# Altium PCB PCB.PcbDoc (part 2 of 3)
Units mm, origin at the board's own origin, x right, y up, seen from the top; angles counter-clockwise.
Board outline 68.58 x 53.34 mm, 4 copper layers (TOP, INNER1, INNER2, BOTTOM), stack 1.586 mm thick; 94 components, 161 nets, 536 pads, 304 vias.
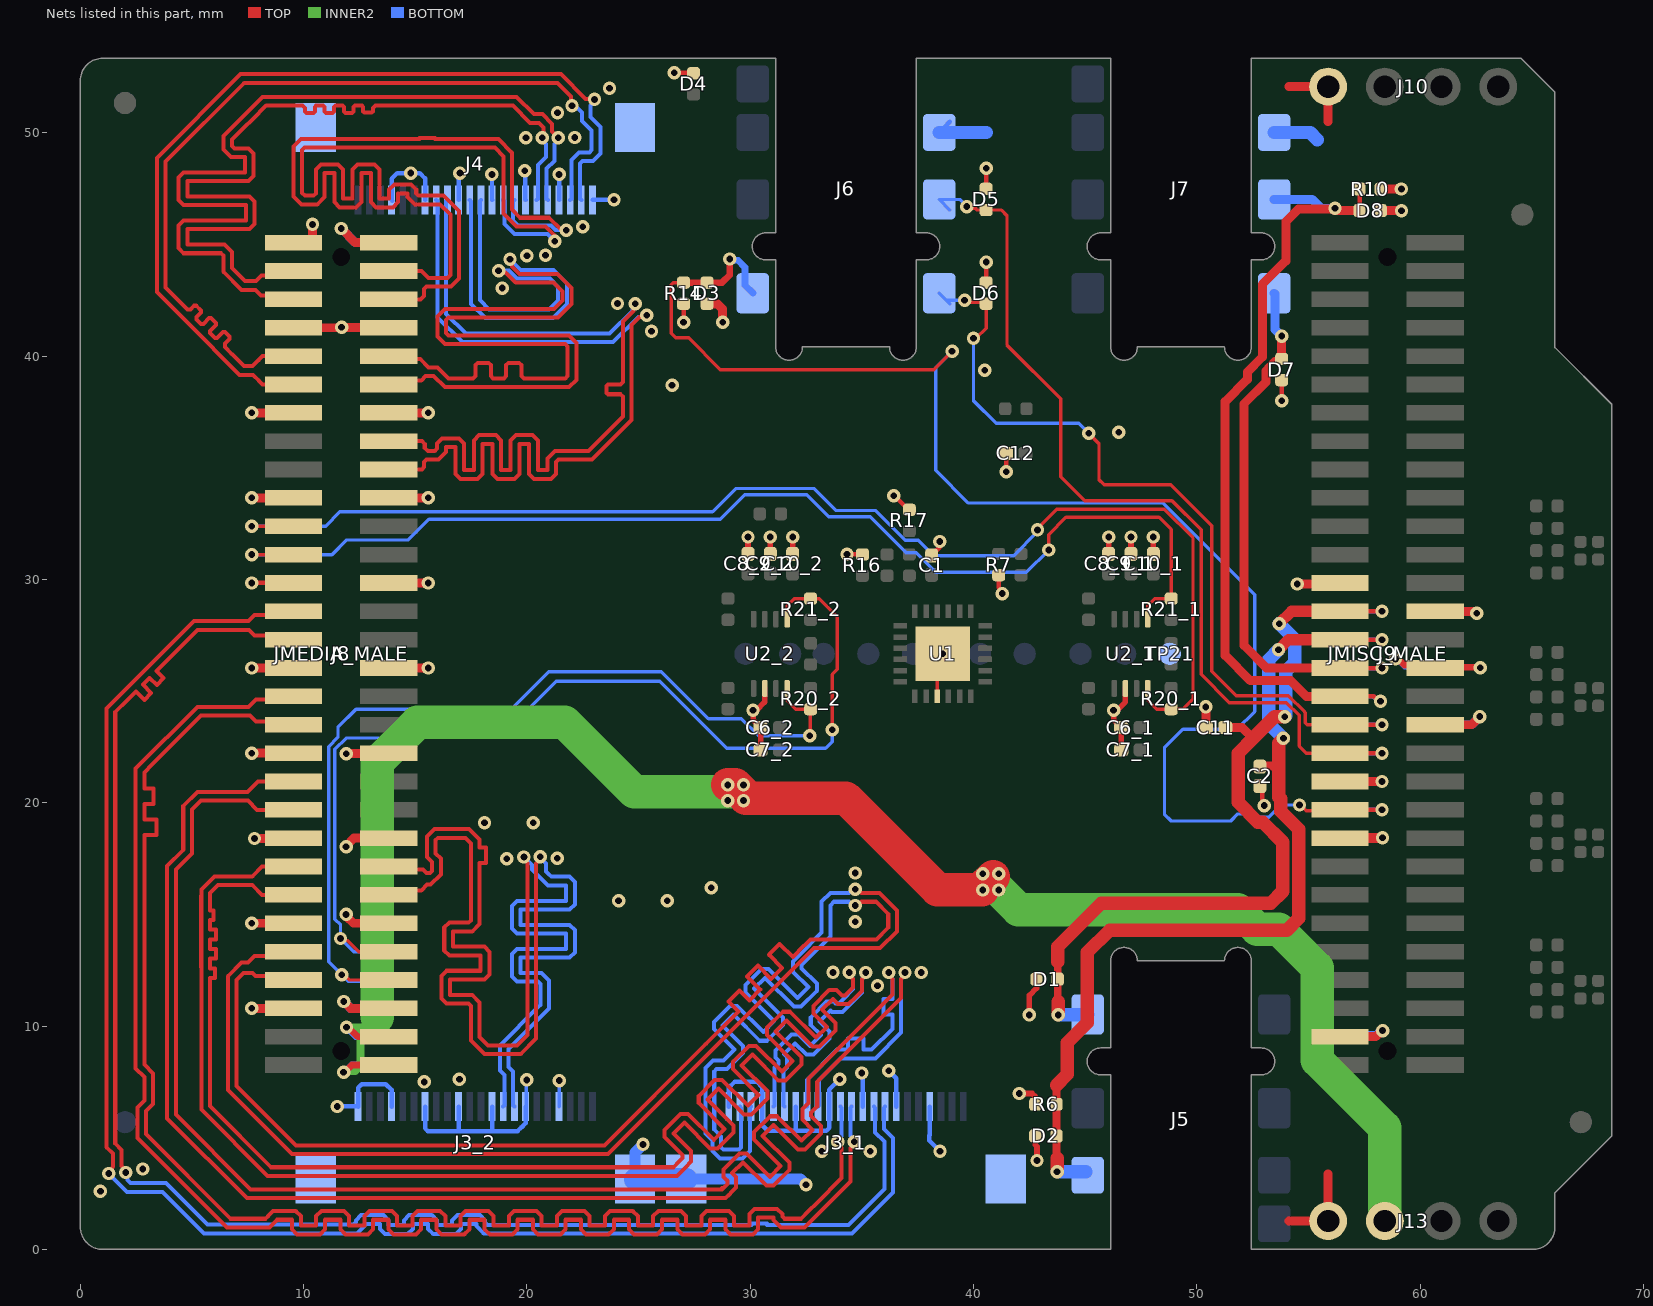
[diagram p4: the nets of this part, all layers, seen from the top]

## Via types
v1: diameter 0.6, hole 0.3, TOP to BOTTOM, tented both sides, 304 vias

## Nets (pads, with @x,y where several pads share a name; then routed paths per layer and width w, separated by ;. In a path a pad name is that pad's centre, name@x,y a point inside that pad or via, vN(x,y) a via of type N, cw(c..) or ccw(c..) an arc to the next point about the centre after c; other vN are vias at no path point) (continued)
CSI0_D3_N: J3_2.14 JMEDIA_MALE.45 | length 52.9
  TOP w0.18: JMEDIA_MALE.45@13.819,17.145 13.962,17.002 15.347,17.002 15.503,16.846 15.652,16.846 15.757,16.952 15.757,17.343 15.524,17.576 15.524,18.489 15.858,18.822 17.412,18.822 17.886,18.348 17.886,18.088 17.886,17.998 18.173,17.998 18.173,17.31 17.886,17.31 17.886,16.284 17.886,15.5 17.886,14.578 17.552,14.244 16.688,14.244 16.688,13.556 18.094,13.556 18.322,13.327 18.322,12.316 18.094,12.088 16.561,12.088 16.561,11.4 17.552,11.4 17.886,11.066 17.886,10.7 17.886,9.514 18.263,9.137 19.563,9.137 20.021,9.595 20.021,17.305 19.867,17.459 v1(19.867,17.573)
  BOTTOM w0.18: J3_2.14@18.94,6.395 18.995,6.45 18.995,7.805 18.786,8.014 18.786,9.137 20.506,10.858 20.6,10.952 20.6,11.883 20.495,11.988 19.558,11.988 19.33,12.217 19.33,13.228 19.558,13.456 21.753,13.456 21.753,14.144 19.558,14.144 19.33,14.373 19.33,15.384 19.558,15.612 21.753,15.612 21.753,16.3 20.934,16.3 20.6,16.634 20.443,16.791 20.423,16.811 20.342,16.892 20.22,17.014 20.22,17.219 v1(19.867,17.573)
CSI0_D3_P: J3_2.15 JMEDIA_MALE.47 | length 53
  TOP w0.18: JMEDIA_MALE.47@13.819,15.875 14.023,16.079 15.269,16.079 15.522,16.333 15.69,16.333 16.147,16.79 16.147,17.504 15.914,17.738 15.914,18.327 16.019,18.432 17.25,18.432 17.496,18.186 17.496,15.5 17.496,14.739 17.391,14.634 16.526,14.634 16.298,14.405 16.298,13.394 16.526,13.166 17.932,13.166 17.932,12.478 16.4,12.478 16.171,12.249 16.171,11.238 16.4,11.01 17.391,11.01 17.496,10.904 17.496,10.7 17.496,9.352 18.101,8.747 19.724,8.747 20.411,9.434 20.411,17.291 20.594,17.474 v1(20.594,17.588)
  BOTTOM w0.18: J3_2.15@19.44,6.395 19.385,6.45 19.385,7.967 19.176,8.176 19.176,8.976 20.99,10.79 20.99,10.858 20.99,12.044 20.656,12.378 19.72,12.378 19.72,13.066 21.915,13.066 22.143,13.295 22.143,14.306 21.915,14.534 19.72,14.534 19.72,15.222 21.915,15.222 22.143,15.451 22.143,16.462 21.915,16.69 21.095,16.69 20.99,16.796 20.861,16.925 20.861,17.009 20.861,17.289 20.594,17.556 v1(20.594,17.588)
CSI1_CK_N: J3_1.8 JMEDIA_MALE.42 | length 74.3
  TOP w0.18: JMEDIA_MALE.42@9.549,19.685 7.915,19.685 7.5,20.1 5.4,20.1 5,19.7 5,17.735 4.276,17.011 4.276,6.03 7.618,2.687 28.736,2.687 28.799,2.751 ; 28.728,2.751 28.799,2.751 ; v1(36.2,12.4) 36.2,12.286 36.369,12.117 36.369,11.414 32.612,7.657 32.612,6.564 32.591,6.542 32.332,6.284 32.332,5.812 32.789,5.355 32.302,4.868 31.209,5.962 30.886,5.962 30.171,5.247 30.171,4.924 31.367,3.728 30.881,3.241 29.835,4.287 29.512,4.287 28.797,3.572 28.797,3.249 28.972,3.073 28.972,2.924 28.799,2.751
  BOTTOM w0.18: J3_1.8@32.54,6.395 32.54,7.593 33.89,8.943 34.29,8.943 34.38,8.943 34.38,9.449 35.068,9.449 35.068,8.943 35.443,8.943 36.369,9.869 36.369,10.427 36.369,10.517 35.976,10.517 35.976,11.205 36.369,11.205 36.369,11.765 36.369,12.117 36.2,12.286 v1(36.2,12.4)
CSI1_CK_P: J3_1.9 JMEDIA_MALE.40 | length 74.6
  TOP w0.18: JMEDIA_MALE.40@9.884,20.955 JMEDIA_MALE.40@9.549,20.955 7.955,20.955 7.49,20.49 5.238,20.49 4.61,19.862 4.61,17.897 3.886,17.172 3.886,5.868 7.457,2.297 28.897,2.297 29.039,2.439 29.189,2.589 29.362,2.762 29.362,3.235 29.187,3.41 29.674,3.897 30.719,2.851 31.042,2.851 31.757,3.566 31.757,3.889 30.561,5.085 31.048,5.572 32.141,4.478 32.464,4.478 33.179,5.193 33.179,5.516 32.722,5.973 32.722,6.122 32.867,6.267 33.002,6.402 33.002,7.495 36.759,11.252 36.759,12.114 36.93,12.285 v1(36.93,12.399)
  BOTTOM w0.18: J3_1.9@33.04,6.395 33.083,6.438 33.083,7.585 34.051,8.553 35.604,8.553 36.759,9.708 36.759,12.114 36.93,12.285 v1(36.93,12.399)
CSI1_D0_N: J3_1.2 JMEDIA_MALE.54 | length 74.4
  TOP w0.18: JMEDIA_MALE.54@9.884,12.065 9.701,12.248 7.837,12.248 7.71,12.375 7.305,12.375 7,12.07 7,7.31 9.649,4.661 23.479,4.661 28.009,9.191 29.477,10.658 29.036,11.099 29.523,11.585 29.963,11.145 30.45,11.631 29.859,12.222 30.345,12.708 30.936,12.118 31.423,12.604 30.832,13.195 31.318,13.681 31.909,13.091 32.395,13.577 32.459,13.641 32.702,13.884 35.662,13.884 36.182,14.404 36.182,15.021 35.635,15.569 34.982,15.569 34.814,15.4 v1(34.7,15.4)
  BOTTOM w0.18: J3_1.2@29.54,6.395 29.595,6.34 29.595,4.573 29.49,4.467 28.805,4.467 28.7,4.573 28.7,5.048 28.39,5.358 28.39,6.855 28.39,7.5 28.39,7.971 28.495,8.077 28.968,8.077 29.683,8.792 29.683,9.115 28.767,10.031 29.253,10.517 30.427,9.343 30.75,9.343 31.465,10.058 31.465,10.381 30.172,11.675 30.658,12.161 31.952,10.868 32.275,10.868 32.99,11.583 32.99,11.906 32.307,12.589 32.307,12.738 32.451,12.882 33.59,14.021 33.59,15.41 33.748,15.569 34.418,15.569 34.586,15.4 v1(34.7,15.4)
CSI1_D0_P: J3_1.3 JMEDIA_MALE.52 | length 74.4
  TOP w0.18: JMEDIA_MALE.52@9.884,13.335 9.683,13.134 7.804,13.134 7.518,12.848 7.227,12.848 6.61,12.232 6.61,7.148 9.487,4.271 23.641,4.271 32.864,13.494 35.823,13.494 36.572,14.243 36.572,15.183 35.796,15.959 34.982,15.959 34.814,16.127 v1(34.7,16.127)
  BOTTOM w0.18: J3_1.3@30.04,6.395 29.985,6.34 29.985,4.411 29.651,4.077 28.644,4.077 28.31,4.411 28.31,4.887 28,5.197 28,7.212 28,7.5 28,8.133 28.334,8.467 28.806,8.467 29.293,8.953 28.377,9.869 28.377,10.192 29.092,10.907 29.415,10.907 30.589,9.733 31.075,10.22 29.782,11.513 29.782,11.836 30.497,12.551 30.82,12.551 32.113,11.258 32.6,11.744 31.917,12.427 31.917,12.9 32.175,13.158 33.2,14.183 33.2,15.572 33.587,15.959 34.418,15.959 34.586,16.127 v1(34.7,16.127)
CSI1_D1_N: J3_1.5 JMEDIA_MALE.48 | length 74
  TOP w0.18: JMEDIA_MALE.48@9.549,15.875 8.14,15.875 7.7,16.315 6.167,16.315 5.809,15.958 5.809,15.668 5.809,15.578 5.809,15.291 5.809,15.187 5.972,15.187 5.972,14.753 5.806,14.753 5.806,14.319 6.08,14.319 6.08,13.885 5.806,13.885 5.806,13.451 6.08,13.451 6.08,13.017 5.809,13.017 5.809,12.583 6.03,12.583 6.03,12.149 5.809,12.149 5.809,11.625 5.809,6.417 8.548,3.678 26.557,3.678 26.821,3.943 26.966,4.087 26.966,4.236 26.171,5.03 26.171,5.353 26.886,6.068 27.21,6.068 28.368,4.91 28.855,5.396 27.696,6.555 27.696,6.878 28.411,7.593 28.734,7.593 29.893,6.434 30.379,6.921 29.221,8.079 29.221,8.403 29.935,9.117 30.259,9.117 31.417,7.959 31.904,8.445 30.745,9.604 30.745,9.927 31.46,10.642 31.783,10.642 32.942,9.483 33.428,9.97 32.825,10.573 32.825,10.897 33.54,11.611 33.863,11.611 34.102,11.372 34.251,11.372 34.455,11.576 34.609,11.73 34.609,11.939 34.609,12.119 34.439,12.288 v1(34.439,12.402)
  BOTTOM w0.18: J3_1.5@31.04,6.395 31.095,6.45 31.095,8.147 31.113,8.165 31.258,8.309 31.258,8.458 31.133,8.583 31.133,8.906 31.848,9.621 32.171,9.621 32.684,9.109 33.17,9.595 32.711,10.054 32.711,10.377 33.426,11.092 33.749,11.092 33.82,11.021 33.969,11.021 34.172,11.223 34.609,11.66 34.609,12.119 34.439,12.288 v1(34.439,12.402)
CSI1_D1_P: J3_1.6 JMEDIA_MALE.46 | length 74.4
  TOP w0.18: JMEDIA_MALE.46@9.884,17.145 JMEDIA_MALE.46@9.549,17.145 8.14,17.145 7.7,16.705 6.005,16.705 5.419,16.119 5.419,15.829 5.416,15.825 5.416,12.642 5.419,12.638 5.419,6.255 8.386,3.288 26.718,3.288 27.097,3.667 27.356,3.926 27.356,4.398 26.561,5.192 27.048,5.678 28.207,4.52 28.53,4.52 29.245,5.234 29.245,5.558 28.086,6.716 28.572,7.203 29.731,6.044 30.054,6.044 30.769,6.759 30.769,7.082 29.611,8.241 30.097,8.727 31.256,7.569 31.579,7.569 32.294,8.284 32.294,8.607 31.135,9.766 31.622,10.252 32.78,9.093 33.104,9.093 33.818,9.808 33.818,10.131 33.215,10.735 33.701,11.221 33.94,10.982 34.412,10.982 34.73,11.3 34.989,11.559 34.999,11.569 34.999,12.116 35.17,12.287 v1(35.17,12.401)
  BOTTOM w0.18: J3_1.6@31.54,6.395 31.485,6.45 31.485,7.793 31.485,7.985 31.648,8.148 31.648,8.62 31.523,8.744 32.01,9.231 32.522,8.719 32.845,8.719 33.56,9.433 33.56,9.757 33.101,10.215 33.588,10.702 33.659,10.631 34.131,10.631 34.447,10.947 34.999,11.499 34.999,12.116 35.17,12.287 v1(35.17,12.401)
CSI1_D2_N: J3_1.11 JMEDIA_MALE.36 | length 74
  TOP w0.18: JMEDIA_MALE.36@9.549,23.495 9.409,23.635 7.865,23.635 7.595,23.905 6.505,23.905 5.405,23.905 3.217,21.717 2.865,21.365 2.865,20.629 3.268,20.629 3.268,19.941 2.865,19.941 2.865,19.253 3.409,19.253 3.409,18.565 2.865,18.565 2.865,17.787 2.865,8.272 3.255,7.882 3.255,6.51 2.941,6.196 2.941,5.16 6.729,1.372 8.098,1.372 8.303,1.372 8.408,1.477 8.408,1.489 8.637,1.717 9.648,1.717 9.876,1.489 9.876,1.063 10.564,1.063 10.564,1.489 10.793,1.717 11.804,1.717 12.032,1.489 12.032,1.063 12.72,1.063 12.72,1.489 12.949,1.717 13.96,1.717 14.188,1.489 14.188,1.063 14.876,1.063 14.876,1.489 15.105,1.717 16.116,1.717 16.344,1.489 16.344,1.063 17.032,1.063 17.032,1.489 17.261,1.717 18.272,1.717 18.5,1.489 18.5,1.063 19.188,1.063 19.188,1.489 19.417,1.717 20.428,1.717 20.656,1.489 20.656,1.063 21.344,1.063 21.344,1.489 21.573,1.717 22.584,1.717 22.812,1.489 22.812,1.063 23.5,1.063 23.5,1.489 23.729,1.717 24.74,1.717 24.968,1.489 24.968,1.063 25.656,1.063 25.656,1.489 25.885,1.717 26.896,1.717 27.124,1.489 27.124,1.063 27.812,1.063 27.812,1.489 28.041,1.717 29.052,1.717 29.28,1.489 29.28,1.063 29.968,1.063 29.968,1.585 30.197,1.813 31.208,1.813 31.436,1.585 31.436,1.477 31.542,1.372 32.272,1.372 32.616,1.716 32.982,2.082 34.095,3.195 34.095,4.541 33.926,4.71 v1(33.926,4.823)
  BOTTOM w0.18: v1(33.926,4.823) 33.926,4.911 34.095,5.08 34.095,6.34 J3_1.11@34.04,6.395
CSI1_D2_P: J3_1.12 JMEDIA_MALE.34 | length 74.1
  TOP w0.18: JMEDIA_MALE.34@9.549,24.765 9.419,24.635 7.868,24.635 7.528,24.295 6.667,24.295 5.244,24.295 2.475,21.527 2.475,8.11 2.865,7.72 2.865,6.672 2.551,6.357 2.551,4.998 6.567,0.982 8.098,0.982 8.464,0.982 8.798,1.316 8.798,1.327 9.486,1.327 9.486,0.902 9.715,0.673 10.726,0.673 10.954,0.902 10.954,1.327 11.642,1.327 11.642,0.902 11.871,0.673 12.882,0.673 13.11,0.902 13.11,1.327 13.798,1.327 13.798,0.902 14.027,0.673 15.038,0.673 15.266,0.902 15.266,1.327 15.954,1.327 15.954,0.902 16.183,0.673 17.194,0.673 17.422,0.902 17.422,1.327 18.11,1.327 18.11,0.902 18.339,0.673 19.35,0.673 19.578,0.902 19.578,1.327 20.266,1.327 20.266,0.902 20.495,0.673 21.506,0.673 21.734,0.902 21.734,1.327 22.422,1.327 22.422,0.902 22.651,0.673 23.662,0.673 23.89,0.902 23.89,1.327 24.578,1.327 24.578,0.902 24.807,0.673 25.818,0.673 26.046,0.902 26.046,1.327 26.734,1.327 26.734,0.902 26.963,0.673 27.974,0.673 28.202,0.902 28.202,1.327 28.89,1.327 28.89,0.902 29.119,0.673 30.13,0.673 30.358,0.902 30.358,1.423 31.046,1.423 31.046,1.316 31.38,0.982 32.433,0.982 32.892,1.441 32.982,1.531 34.485,3.033 34.485,4.541 34.653,4.71 v1(34.653,4.823)
  BOTTOM w0.18: J3_1.12@34.54,6.395 34.485,6.34 34.485,5.08 34.653,4.911 v1(34.653,4.823)
CSI1_D3_N: J3_1.14 JMEDIA_MALE.30 | length 74
  TOP w0.18: v1(2.037,3.443) 2.037,3.556 1.85,3.743 1.85,4.45 1.565,4.735 1.565,24.058 2.119,24.613 2.49,24.983 2.864,24.609 3.171,24.916 2.797,25.29 3.104,25.597 3.424,25.277 3.731,25.584 3.411,25.904 5.252,27.745 6.035,27.745 7.112,27.745 7.555,27.745 7.799,27.501 9.353,27.501 JMEDIA_MALE.30@9.549,27.305
  BOTTOM w0.18: v1(2.037,3.443) 2.117,3.362 2.117,3.107 2.258,2.967 3.833,2.967 5.69,1.11 12.034,1.11 12.238,1.11 12.343,1.215 12.343,1.303 12.572,1.532 13.583,1.532 13.811,1.303 13.811,1.084 14.499,1.084 14.499,1.303 14.728,1.532 15.739,1.532 15.967,1.303 15.967,1.084 16.655,1.084 16.655,1.303 16.884,1.532 17.895,1.532 18.123,1.303 18.123,1.201 18.229,1.096 19.156,1.096 29.965,1.096 30.055,1.096 30.055,1.159 30.743,1.159 30.743,1.096 32.433,1.096 34.398,1.096 36.01,2.708 36.01,4.823 35.595,5.238 35.595,6.34 J3_1.14@35.54,6.395
CSI1_D3_P: J3_1.15 JMEDIA_MALE.28 | length 74
  TOP w0.18: v1(1.273,3.4) 1.273,3.514 1.46,3.701 1.46,4.289 1.175,4.574 1.175,24.22 5.09,28.135 7.535,28.135 7.8,28.4 9.374,28.4 JMEDIA_MALE.28@9.549,28.575
  BOTTOM w0.18: v1(1.273,3.4) 2.096,2.577 3.672,2.577 5.528,0.72 12.034,0.72 12.399,0.72 12.733,1.054 12.733,1.142 13.421,1.142 13.421,0.923 13.65,0.694 14.661,0.694 14.889,0.923 14.889,1.142 15.577,1.142 15.577,0.923 15.806,0.694 16.817,0.694 17.045,0.923 17.045,1.142 17.733,1.142 17.733,1.04 18.067,0.706 19.156,0.706 34.56,0.706 36.4,2.546 36.4,4.985 35.985,5.4 35.985,6.34 J3_1.15@36.04,6.395
DC_IN: J8.57 J8.59 J13.3 JMEDIA_MALE.57 JMEDIA_MALE.59 | length 83.4
  TOP w0.3: v1(11.79,7.937) 11.844,7.937 12.162,8.255 JMEDIA_MALE.59@13.484,8.255 ; v1(11.92,9.944) 12.002,9.944 12.421,9.525 JMEDIA_MALE.57@13.484,9.525
  TOP w1.5: v1(29,20.8) 29.338,20.8 29.7,20.438 ; v1@29.811,20.211 34.289,20.211 38.386,16.114 40.388,16.114 40.388,16.202 v1@40.876,16.69
  INNER2 w0.35: v1(11.79,7.937) 11.838,7.985 12.314,7.985 12.549,8.22 12.549,9.937 ; v1(11.92,9.944) 12.486,9.944 ; 12.486,9.937 12.549,9.937 ; 13.3,10.396 12.841,9.937 12.549,9.937
  INNER2 w1.5: 13.3,10.396 13.3,21.8 15.1,23.6 21.7,23.6 24.8,20.5 29.2,20.5 ; 40.632,16.446 40.783,16.446 v1(41.137,16.092) 42.013,15.216 51.836,15.216 52.712,14.34 53.672,14.34 55.397,12.616 55.397,8.471 58.42,5.447 J13.3@58.42,1.27
  BOTTOM w0.3: v1(11.79,7.937) 11.844,7.937 12.162,8.255 J8.59@13.427,8.255 ; v1(11.92,9.944) 12.34,9.525 J8.57@13.427,9.525
  other v1: 40.41,16.092 40.41,16.819 41.137,16.819 29,20.1 29.7,20.1 29.7,20.8
DSI_CLK_N: J4.8 JMEDIA_MALE.3 | length 40.5
  TOP w0.18: JMEDIA_MALE.3@13.819,43.815 15.285,43.815 15.589,43.511 16.064,43.511 16.438,43.511 16.569,43.643 16.569,46.345 16.114,46.8 15.974,46.8 14.988,46.8 14.655,47.134 14.655,47.293 14.225,47.293 14.225,46.895 13.996,46.667 13.243,46.667 13.015,46.895 13.015,48.199 12.585,48.199 12.585,46.895 12.356,46.667 11.603,46.667 11.375,46.895 11.375,48.199 10.945,48.199 10.945,47.134 10.611,46.8 10.245,46.8 9.9,46.8 9.548,47.152 9.548,49.395 9.882,49.729 15.1,49.729 15.19,49.729 15.19,49.768 15.878,49.768 15.878,49.729 16.3,49.729 18.723,49.729 19.341,49.11 19.341,46.559 19.7,46.2 21,46.2 21.5,45.7 21.714,45.7 v1(21.768,45.645)
  BOTTOM w0.18: J4.8@19.44,46.995 19.385,46.94 19.385,46.075 19.605,45.855 21.089,45.855 21.284,45.66 21.754,45.66 v1(21.768,45.645)
DSI_CLK_P: J4.9 JMEDIA_MALE.5 | length 40.9
  TOP w0.18: JMEDIA_MALE.5@13.484,42.545 JMEDIA_MALE.5@13.819,42.545 15.245,42.545 15.4,42.7 15.4,43.016 15.505,43.121 15.902,43.121 16.599,43.121 16.959,43.481 16.959,46.506 16.275,47.19 15.974,47.19 15.15,47.19 15.045,47.295 15.045,47.455 14.816,47.683 14.063,47.683 13.835,47.455 13.835,47.057 13.405,47.057 13.405,48.36 13.176,48.589 12.423,48.589 12.195,48.36 12.195,47.057 11.765,47.057 11.765,48.36 11.536,48.589 10.783,48.589 10.555,48.36 10.555,47.295 10.449,47.19 10.245,47.19 10.062,47.19 9.938,47.314 9.938,49.233 10.043,49.339 14.5,49.339 16.6,49.339 18.561,49.339 18.951,48.949 18.951,46.397 19.538,45.81 20.838,45.81 21.224,45.424 21.224,45.162 v1(21.243,45.143)
  BOTTOM w0.18: J4.9@18.94,46.995 18.995,46.94 18.995,45.913 19.443,45.465 20.927,45.465 21.243,45.15 v1(21.243,45.143)
DSI_D0_N: J4.2 JMEDIA_MALE.12 | length 40.9
  TOP w0.18: JMEDIA_MALE.12@9.549,38.735 8.164,38.735 8,38.899 7.739,39.161 7.139,39.161 4.8,41.5 3.43,42.87 3.43,48.882 7.18,52.631 21.522,52.631 22.627,51.526 23.001,51.526 v1(23.027,51.5)
  BOTTOM w0.18: J4.2@22.44,46.995 22.385,47.05 22.385,48.634 22.49,48.739 22.956,48.739 23.29,49.073 23.29,50.272 22.859,50.704 22.859,51.218 23.027,51.386 v1(23.027,51.5)
DSI_D0_P: J4.3 JMEDIA_MALE.10 | length 41
  TOP w0.18: JMEDIA_MALE.10@9.549,40.005 8.164,40.005 8,39.841 7.71,39.551 7.34,39.551 6.845,40.045 6.782,40.109 6.475,40.416 6.475,40.565 6.69,40.78 6.69,40.872 6.475,41.087 6.383,41.087 6.12,40.824 6.028,40.824 5.813,41.039 5.813,41.131 6.076,41.394 6.076,41.486 5.861,41.7 5.769,41.7 5.506,41.438 5.414,41.438 5.199,41.652 5.199,41.744 5.407,41.952 5.407,42.044 5.192,42.259 5.1,42.259 4.94,42.099 4.791,42.099 3.963,42.928 3.899,42.991 3.82,43.07 3.82,48.72 7.341,52.241 21.36,52.241 21.965,51.637 21.965,51.277 v1(22.021,51.221)
  BOTTOM w0.18: J4.3@21.94,46.995 21.995,47.05 21.995,48.795 22.329,49.129 22.795,49.129 22.9,49.235 22.9,50.111 22.468,50.542 22.468,50.906 22.233,51.141 22.101,51.141 v1(22.021,51.221)
DSI_D1_N: J4.5 JMEDIA_MALE.6 | length 40.6
  TOP w0.18: JMEDIA_MALE.6@9.549,42.545 9.367,42.727 8.099,42.727 7.855,42.972 7.22,42.972 6.41,43.781 6.41,44.3 6.41,44.504 6.305,44.61 4.629,44.61 4.4,44.838 4.4,45.849 4.629,46.078 7.417,46.078 7.417,46.766 4.629,46.766 4.4,46.994 4.4,48.005 4.629,48.234 7.375,48.234 7.375,48.922 6.744,48.922 6.41,49.256 6.41,49.862 7.059,50.511 7.149,50.601 8.165,51.616 19.535,51.616 20.309,50.843 20.694,50.843 21.133,50.404 21.133,50.067 21.41,49.79 v1(21.41,49.778)
  BOTTOM w0.18: J4.5@20.94,46.995 20.885,47.05 20.885,48.395 21.241,48.752 21.241,49.495 21.41,49.664 v1(21.41,49.778)
DSI_D1_P: J4.6 JMEDIA_MALE.4 | length 40.6
  TOP w0.18: JMEDIA_MALE.4@9.549,43.815 9.337,43.603 8.104,43.603 7.876,43.375 7.368,43.375 6.8,43.943 6.8,44.3 6.8,44.666 6.466,45 4.79,45 4.79,45.688 7.579,45.688 7.807,45.916 7.807,46.927 7.579,47.156 4.79,47.156 4.79,47.844 7.536,47.844 7.765,48.072 7.765,49.083 7.536,49.312 6.905,49.312 6.8,49.417 6.8,49.7 7.335,50.235 7.702,50.602 8.326,51.226 9.436,51.226 9.96,51.226 10.065,51.121 10.065,50.964 10.131,50.899 10.434,50.899 10.499,50.964 10.499,51.161 10.565,51.226 10.868,51.226 10.933,51.161 10.933,50.964 10.999,50.899 11.302,50.899 11.367,50.964 11.367,51.161 11.433,51.226 11.736,51.226 11.801,51.161 11.801,50.964 11.867,50.899 12.17,50.899 12.235,50.964 12.235,51.161 12.301,51.226 12.604,51.226 12.669,51.161 12.669,50.968 12.735,50.903 13.038,50.903 13.103,50.968 13.103,51.121 13.209,51.226 14.116,51.226 19.374,51.226 20.147,50.453 20.532,50.453 20.743,50.242 20.743,49.838 v1(20.683,49.778)
  BOTTOM w0.18: J4.6@20.44,46.995 20.495,47.05 20.495,48.557 20.851,48.913 20.851,49.495 20.683,49.664 v1(20.683,49.778)
DSI_D2_N: J4.11 JMEDIA_MALE.9 | length 40.5
  TOP w0.18: JMEDIA_MALE.9@13.819,40.005 13.947,39.877 15.223,39.877 15.6,39.5 15.987,39.5 16.487,39 17.5,39 17.59,39 17.695,39.105 17.695,39.602 17.799,39.705 18.28,39.705 18.383,39.602 18.383,39.103 18.487,39 18.968,39 19.071,39.103 19.071,39.602 19.175,39.705 19.656,39.705 19.759,39.602 19.759,39.105 19.865,39 20.8,39 21.717,39 21.823,39.105 21.823,40.432 21.717,40.538 16.322,40.538 15.988,40.872 15.988,41.787 16.322,42.121 21.221,42.121 21.6,42.5 21.6,42.9 21.2,43.3 19.5,43.3 19.05,43.75 18.811,43.75 v1(18.731,43.831)
  BOTTOM w0.18: J4.11@17.94,46.995 17.891,46.946 17.891,42.509 18.3,42.1 21,42.1 21.4,42.5 21.4,43.1 21.03,43.47 19.559,43.47 19.201,43.828 18.734,43.828 v1(18.731,43.831)
DSI_D2_P: J4.12 JMEDIA_MALE.11 | length 40.6
  TOP w0.18: JMEDIA_MALE.11@13.819,38.735 13.996,38.912 15.269,38.912 15.466,39.11 15.825,39.11 16.325,38.61 21.879,38.61 22.213,38.944 22.213,40.594 21.879,40.928 16.483,40.928 16.378,41.033 16.378,41.625 16.483,41.731 21.382,41.731 21.99,42.338 21.99,43.062 21.362,43.69 19.662,43.69 19.325,44.026 19.325,44.265 v1(19.245,44.345)
  BOTTOM w0.18: J4.12@17.44,46.995 17.5,46.935 17.5,46.33 ; 17.501,46.33 17.501,42.348 18.138,41.71 21.162,41.71 21.79,42.338 21.79,43.262 21.191,43.86 19.72,43.86 v1@19.245,44.336
DSI_D3_N: J4.14 JMEDIA_MALE.15 | length 40.6
  TOP w0.18: JMEDIA_MALE.15@13.819,36.195 15.305,36.195 15.425,36.075 15.425,35.89 15.56,35.755 15.63,35.755 15.873,35.755 15.978,35.86 15.978,36.092 16.207,36.321 16.964,36.321 17.192,36.092 17.192,34.896 17.626,34.896 17.626,36.233 17.855,36.461 18.612,36.461 18.84,36.233 18.84,34.896 19.274,34.896 19.274,36.233 19.503,36.461 20.26,36.461 20.488,36.233 20.488,34.896 20.922,34.896 20.922,35.421 21.256,35.755 21.622,35.755 22.755,35.755 24.3,37.3 24.3,38.1 24.3,38.19 24.195,38.295 23.636,38.295 23.571,38.361 23.571,38.664 23.636,38.729 24.195,38.729 24.3,38.835 24.3,39.365 24.3,41.552 24.775,42.026 24.775,42.265 v1(24.855,42.345)
  BOTTOM w0.18: J4.14@16.44,46.995 16.385,46.94 16.385,41.898 17.268,41.016 23.703,41.016 24.721,42.033 24.721,42.097 24.855,42.231 v1(24.855,42.345)
DSI_D3_P: J4.15 JMEDIA_MALE.17 | length 40.7
  TOP w0.18: JMEDIA_MALE.17@13.819,34.925 15.295,34.925 15.401,35.03 15.401,35.26 15.506,35.365 15.63,35.365 16.034,35.365 16.368,35.699 16.368,35.931 16.802,35.931 16.802,34.734 17.031,34.506 17.788,34.506 18.016,34.734 18.016,36.071 18.45,36.071 18.45,34.734 18.679,34.506 19.436,34.506 19.664,34.734 19.664,36.071 20.098,36.071 20.098,34.734 20.327,34.506 21.084,34.506 21.312,34.734 21.312,35.26 21.418,35.365 21.622,35.365 22.917,35.365 24.69,37.138 24.69,41.39 25.05,41.75 25.289,41.75 v1(25.369,41.831)
  BOTTOM w0.18: J4.15@15.94,46.995 15.995,46.94 15.995,41.737 17.106,40.626 23.865,40.626 24.997,41.757 25.296,41.757 v1(25.369,41.831)
EAR.EAR_M: C2.2 D2.C J5.4 J9.30 JMISC_MALE.30 R6.2 | length 41.9
  TOP w0.2: JMISC_MALE.30@56.747,27.305 v1(58.295,27.305)
  TOP w0.35: 43.718,4.105 D2.C@43.718,5.08 43.718,5.855 ; R6.2@43.718,6.5 43.718,7.355 ; 43.721,5.858 R6.2@43.721,6.5
  TOP w0.4: C2.2@52.845,21.64 53.671,21.64
  TOP w0.5: v1(53.657,26.847) 54.114,27.305 JMISC_MALE.30@56.412,27.305
  TOP w0.6: 43.718,7.355 44.2,7.837 44.2,9.25 45.1,10.15 45.1,13.3 46.1,14.3 54.04,14.3 54.567,14.827 54.567,18.809 53.752,19.624 53.752,20.176 53.671,20.257 53.671,21.64 53.671,22.677 v1(53.88,22.886) ; v1(43.743,3.48) 43.743,4.08 ; JMISC_MALE.30@56.412,27.305 JMISC_MALE.30@56.747,27.305
  BOTTOM w0.2: J9.30@56.705,27.305 v1(58.295,27.305)
  BOTTOM w0.6: v1(43.743,3.48) J5.4@45.038,3.48 ; v1(53.657,26.847) 53.215,26.406 53.215,23.547 53.641,23.121 53.645,23.121 v1(53.88,22.886)
EAR.EAR_P: C11.2 D1.C J5.2 J9.28 JMISC_MALE.28 | length 37.9
  TOP w0.2: JMISC_MALE.28@56.747,28.575 v1(58.295,28.575)
  TOP w0.35: 43.775,12.875 D1.C@43.775,12.1 43.775,11.125 43.8,11.1
  TOP w0.4: C11.2@51.276,23.37 52.03,23.37 52.516,22.884
  TOP w0.5: v1(53.69,28.02) 54.245,28.575 JMISC_MALE.28@56.747,28.575
  TOP w0.6: 43.778,12.878 43.778,13.55 45.728,15.5 53.313,15.5 53.84,16.027 53.84,18.242 52.948,19.135 52.737,19.135 51.852,20.019 51.852,22.22 52.516,22.884 53.48,23.848 v1(53.942,23.848) ; v1(43.8,10.5) 43.8,11.1
  BOTTOM w0.2: J9.28@56.705,28.575 v1(58.295,28.575)
  BOTTOM w0.6: v1(43.8,10.5) 45.095,10.5 J5.2@45.115,10.52 ; v1(53.69,28.02) 54.384,27.326 54.384,26.29 53.98,25.886 53.98,23.886 v1(53.942,23.848)
GND: C1.1 C2.1 C6_1.1 C6_2.1 C7_1.2 C7_2.2 C8_1.1 C8_2.1 C9_1.2 C9_2.2 C10_1.1 C10_2.1 C11.1 C12.1 D1.A D2.A D3.A D4.A D5.A D6.A D7.A D8.A J3_1.1 J3_1.4 J3_1.7 J3_1.10 J3_1.13 J3_1.16 J3_1.19 J3_1.FIX J3_2.1 J3_2.4 J3_2.7 J3_2.10 J3_2.13 J3_2.16 J3_2.19 J3_2.FIX J4.1 J4.4 J4.7 J4.10 J4.13 J4.16 J4.19 J4.FIX J6.4 J7.4 J8.1 J8.2 J8.7 J8.8 J8.13 J8.14 J8.19 J8.20 J8.25 J8.26 J8.31 J8.32 J8.37 J8.38 J8.43 J8.44 J8.49 J8.50 J8.55 J8.56 J9.26 J9.27 J9.31 J9.35 J9.40 J9.44 J9.58 J10.4 J13.4 JMEDIA_MALE.1 JMEDIA_MALE.2 JMEDIA_MALE.7 JMEDIA_MALE.8 JMEDIA_MALE.13 JMEDIA_MALE.14 JMEDIA_MALE.19 JMEDIA_MALE.20 JMEDIA_MALE.25 JMEDIA_MALE.26 JMEDIA_MALE.31 JMEDIA_MALE.32 JMEDIA_MALE.37 JMEDIA_MALE.38 JMEDIA_MALE.43 JMEDIA_MALE.44 JMEDIA_MALE.49 JMEDIA_MALE.50 JMEDIA_MALE.55 JMEDIA_MALE.56 JMISC_MALE.26 JMISC_MALE.27 JMISC_MALE.31 JMISC_MALE.35 JMISC_MALE.40 JMISC_MALE.44 JMISC_MALE.58 R6.1 R7.2 R10.1 R14.1 R16.2 R17.2 TP21.X U1.9 U1.25 U2_1.2 U2_2.2 | length 161.8
  TOP w0.15: U1.9@38.378,24.77 38.378,26.42 v1(38.628,26.67) ; JMISC_MALE.26@56.367,29.8 JMISC_MALE.26@56.412,29.845 ; v1@58.3,18.415 v1(58.315,18.43)
  TOP w0.2: 7.983,29.845 JMEDIA_MALE.26@9.549,29.845 JMEDIA_MALE.26@9.884,29.845 ; v1(26.6,52.7) 26.615,52.685 27.45,52.685 D4.A@27.465,52.67 ; v1(27.015,41.52) R14.1@27.015,42.345 ; v1(34.333,31.125) 34.338,31.12 R16.2@35.028,31.12 ; v1(36.428,33.745) 36.466,33.745 37.091,33.12 R17.2@37.128,33.12 ; C1.1@38.128,31.08 38.49,31.442 v1(38.49,31.699) ; D6.A@40.565,43.295 v1(40.565,44.215) ; D5.A@40.565,47.495 v1(40.565,48.415) ; R7.2@41.128,30.195 41.128,29.64 41.29,29.478 v1(41.29,29.37) ; v1(41.46,34.831) C12.1@41.46,35.646 ; C2.1@52.825,20.75 52.936,20.639 52.936,20.072 53.025,19.983 v1(53.025,19.874) ; v1(53.8,38.005) D7.A@53.8,38.925
  TOP w0.25: C8_2.1@29.903,31.14 v1(29.903,31.905) ; C7_2.2@30.468,22.37 C6_2.1@30.468,23.37 30.457,23.37 30.278,23.549 30.278,23.56 30.138,23.7 30.138,24.127 v1(30.124,24.141) 30.275,24.141 30.649,24.515 ; 30.653,24.515 U2_2.2@30.653,25.12 ; C9_2.2@30.903,31.14 v1(30.903,31.905) ; C10_2.1@31.903,31.14 v1(31.903,31.905) ; v1(42.043,6.98) 42.622,6.98 42.768,6.834 R6.1@42.768,6.5 ; v1(42.5,10.5) 42.5,11.373 42.825,11.698 D1.A@42.825,12.1 ; D2.A@42.768,5.08 42.768,4.678 42.843,4.603 v1(42.843,3.98) ; C8_1.1@46.053,31.14 v1(46.053,31.905) ; C7_1.2@46.618,22.37 C6_1.1@46.618,23.37 46.607,23.37 46.428,23.549 46.428,23.56 46.288,23.7 46.288,24.127 v1(46.274,24.141) 46.425,24.141 46.799,24.515 ; 46.803,24.515 U2_1.2@46.803,25.12 ; C9_1.2@47.053,31.14 v1(47.053,31.905) ; C10_1.1@48.053,31.14 v1(48.053,31.905)
  TOP w0.3: v1(58.899,26.44) 58.956,26.383 59.078,26.383 59.297,26.164 60.553,26.164 JMISC_MALE.31@60.68,26.037 ; JMISC_MALE.31@60.682,26.035 60.714,26.067 62.665,26.067 v1(62.69,26.042)
  TOP w0.4: 7.983,10.795 JMEDIA_MALE.56@9.549,10.795 JMEDIA_MALE.56@9.884,10.795 ; 7.983,14.605 JMEDIA_MALE.50@9.549,14.605 JMEDIA_MALE.50@9.884,14.605 ; 7.983,22.225 JMEDIA_MALE.38@9.549,22.225 JMEDIA_MALE.38@9.884,22.225 ; 7.983,26.035 JMEDIA_MALE.32@9.549,26.035 JMEDIA_MALE.32@9.884,26.035 ; 7.983,33.655 JMEDIA_MALE.20@9.684,33.655 ; 7.983,37.465 JMEDIA_MALE.14@9.684,37.465 ; 8.1,18.4 9.869,18.4 JMEDIA_MALE.44@9.884,18.415 ; JMEDIA_MALE.8@9.884,41.275 11.675,41.275 v1(11.7,41.3) 11.713,41.287 13.671,41.287 JMEDIA_MALE.7@13.684,41.275 ; JMEDIA_MALE.2@9.884,45.103 10.248,45.103 10.4,45.255 v1(10.4,45.9) ; v1(11.684,45.72) 12.319,45.085 JMEDIA_MALE.1@13.684,45.085 ; v1(11.8,11.1) 12.105,10.795 JMEDIA_MALE.55@13.684,10.795 ; v1(11.902,15) 11.94,14.962 11.94,14.899 12.234,14.605 JMEDIA_MALE.49@13.684,14.605 ; v1(11.902,18.03) 11.902,18.064 12.253,18.415 JMEDIA_MALE.43@13.684,18.415 ; v1(11.912,22.202) 11.924,22.214 13.673,22.214 JMEDIA_MALE.37@13.674,22.215 ; JMEDIA_MALE.31@13.684,26.035 v1@15.385,26.035 ; JMEDIA_MALE.25@13.684,29.845 v1@15.385,29.845 ; JMEDIA_MALE.19@13.684,33.655 v1@15.385,33.655 ; JMEDIA_MALE.13@13.684,37.465 v1@15.385,37.465 ; D3.A@28.065,42.345 28.531,42.345 28.765,42.111 v1(28.765,41.52) ; C11.1@50.406,23.37 v1(50.406,24.294) ; 54.13,1.27 J13.4@55.88,1.27 55.88,3.38 ; 54.13,52.07 J10.4@55.88,52.07 55.88,50.52 ; v1(54.5,29.8) JMISC_MALE.26@56.367,29.8 ; JMISC_MALE.58@56.747,9.525 56.753,9.531 58.004,9.531 58.272,9.799 v1(58.319,9.799) ; JMISC_MALE.40@56.747,20.955 v1(58.295,20.955) ; R10.1@58.239,47.485 v1(59.164,47.485) ; D8.A@58.24,46.52 v1(59.165,46.52) ; JMISC_MALE.35@60.682,23.495 62.312,23.495 v1(62.678,23.861) ; JMISC_MALE.27@60.682,28.575 62.399,28.575 62.483,28.491 v1(62.537,28.491)
  TOP w0.45: JMISC_MALE.44@56.762,18.415 v1@58.3,18.415
  BOTTOM w0.15: J3_2.16@19.94,6.395 19.969,6.424 19.969,7.561 v1(19.998,7.59) ; J3_2.19@21.44,6.395 21.441,6.396 v1(21.442,7.56) v1(21.442,7.56) ; v1(54.5,29.8) 56.76,29.8 J9.26@56.805,29.845 ; v1@58.299,18.415 v1(58.315,18.43) ; v1(58.899,26.44) 59.304,26.035 J9.31@60.39,26.035
  BOTTOM w0.2: v1(11.5,6.4) 12.435,6.4 J3_2.1@12.44,6.395 12.44,7.24 12.6,7.4 13.685,7.4 13.94,7.145 J3_2.4@13.94,6.395 ; J4.19@13.97,46.965 J4.19@13.94,46.995 13.94,47.94 14.2,48.2 v1(14.8,48.2) 15.2,48.2 15.44,47.96 J4.16@15.44,46.995 ; J3_2.7@15.44,6.395 15.44,5.417 15.557,5.3 16.94,5.3 ; J3_2.10@16.94,6.395 16.94,5.3 ; J4.13@16.94,46.995 16.94,48.14 v1(17,48.2) ; v1(18.434,48.14) 18.437,48.137 18.437,46.998 J4.10@18.44,46.995 ; J3_2.13@18.44,6.395 18.44,5.34 18.4,5.3 ; v1(19.907,48.3) 19.924,48.283 19.924,47.011 J4.7@19.94,46.995 ; J3_2.16@19.94,6.395 19.94,5.645 19.767,5.473 19.754,5.473 19.581,5.3 18.4,5.3 ; J4.4@21.44,46.995 v1(21.44,48.14) ; J4.1@22.94,46.995 22.945,47 v1(23.9,47) ; J3_1.FIX@27.14,3.145 J3_1.FIX@27.2,3.205 ; J3_1.1@29.04,6.395 29.04,7.24 29.3,7.5 30.3,7.5 30.54,7.26 J3_1.4@30.54,6.395 30.54,5.56 30.787,5.313 32.1,5.313 ; J3_1.7@32.04,6.395 32.04,5.373 32.1,5.313 ; v1(34.007,7.625) 33.54,7.158 J3_1.10@33.54,6.395 33.54,5.44 33.413,5.313 32.1,5.313 ; v1(35,7.9) 35.04,7.86 J3_1.13@35.04,6.395 ; v1(36.2,8) 36.54,7.66 J3_1.16@36.54,6.395 ; J3_1.19@38.04,6.395 38.032,6.387 38.032,5.117 38.025,5.109 38.025,4.875 v1(38.5,4.4) ; J6.4@38.703,50.258 J6.4@38.94,50.495 ; J9.40@56.705,20.955 v1(58.295,20.955) ; J9.27@60.29,28.575 60.374,28.491 v1(62.537,28.491) ; 16.94,5.3 18.4,5.3
  BOTTOM w0.4: v1(11.684,45.72) 12.319,45.085 J8.1@13.527,45.085 ; v1(11.8,11.1) 12.105,10.795 J8.55@13.527,10.795 ; J9.58@56.805,9.525 56.85,9.57 58.028,9.57 58.218,9.761 58.281,9.761 v1(58.319,9.799) ; J9.35@60.29,23.495 62.312,23.495 v1(62.678,23.861)
  BOTTOM w0.45: J9.44@56.705,18.415 v1@58.299,18.415
  BOTTOM w0.5: J3_2.FIX@24.84,3.145 24.84,4.345 25.195,4.7 v1(25.2,4.7) ; J3_1.FIX@27.14,3.145 32.255,3.145 v1(32.5,2.9)
  BOTTOM w0.6: J6.4@38.465,50.02 40.565,50.02 ; J7.4@53.465,50.02 55.08,50.02 55.4,49.7
  BOTTOM w1: J3_2.FIX@24.84,3.145 J3_1.FIX@27.14,3.145
  other v1: 0.9,2.6 2.8,3.6 33.2,4.4 35.38,4.4 15.4,7.5 16.978,7.619 7.683,10.795 35.7,11.8 37.661,12.398 33.709,12.403 7.683,14.605 34.7,14.673 24.106,15.619 26.287,15.617 28.254,16.2 34.7,16.854 19.1,17.5 21.36,17.515 7.8,18.4 18.1,19.1 20.29,19.1 7.683,22.225 7.683,26.035 15.585,26.035 7.683,29.845 15.585,29.845 7.683,33.655 15.585,33.655 46.5,36.6 7.683,37.465 15.585,37.465 26.5,38.7 40.502,39.37 25.582,41.118 24.059,42.36 18.901,43.05 20,44.5 20.835,44.523 22.5,45.8 19.956,49.778 22.137,49.793 21.37,50.899 23.7,52
GPIO_22: J8.53 JMEDIA_MALE.53 R20_2.1 U2_2.4 | length 41.9
  TOP w0.15: v1(11.705,12.3) 11.801,12.3 12.036,12.065 JMEDIA_MALE.53@13.684,12.065 ; U2_2.4@31.653,25.12 31.665,25.107 31.665,24.577 32.047,24.195 R20_2.1@32.703,24.195 32.686,24.178 32.686,23.015 v1(32.669,22.998)
  BOTTOM w0.15: J8.53@13.527,12.065 13.462,12 12.005,12 v1(11.705,12.3) 11.123,12.882 11.123,22.515 11.538,22.93 11.538,23.385 12.346,24.193 19.293,24.193 20.976,25.876 26.024,25.876 28.13,23.77 29.603,23.77 30.374,22.998 v1(32.669,22.998)
GPIO_23: J8.51 JMEDIA_MALE.51 R21_2.1 U2_2.5 | length 47.1
  TOP w0.15: v1(11.653,13.921) 11.74,13.835 11.965,13.835 12.465,13.335 JMEDIA_MALE.51@13.684,13.335 ; U2_2.5@31.653,28.22 31.653,28.836 31.962,29.145 R21_2.1@32.703,29.145 33.093,29.145 33.9,28.338 33.9,25.98 33.668,25.748 v1(33.668,23.267)
  BOTTOM w0.15: J8.51@13.4,13.461 13.527,13.335 12.239,13.335 v1(11.653,13.921) 11.653,14.539 11.4,14.792 11.4,22.4 11.9,22.9 15,22.9 15.845,23.745 19.6,23.745 19.955,24.1 19.964,24.1 21.314,25.45 25.943,25.45 28.953,22.441 33.375,22.441 33.668,22.734 v1(33.668,23.267)
GPIO_29: J8.22 JMEDIA_MALE.22 R20_1.1 U2_1.4 | length 57.3
  TOP w0.15: 7.983,32.385 JMEDIA_MALE.22@9.884,32.385 ; v1(42.865,32.22) 42.865,32.27 43.733,33.138 48.552,33.138 49.832,31.859 49.832,24.652 49.374,24.195 R20_1.1@48.853,24.195 48.197,24.195 47.815,24.577 47.815,25.107 U2_1.4@47.803,25.12
  BOTTOM w0.15: 7.983,32.385 9.842,32.385 10.985,32.385 11.626,33.026 28.313,33.026 29.36,34.073 32.862,34.073 33.847,33.088 35.616,33.088 36.946,31.757 37.531,31.757 38.218,31.07 41.8,31.07 42.865,32.135 v1(42.865,32.22)
  other v1: 7.683,32.385
GPIO_30: J8.24 JMEDIA_MALE.24 R21_1.1 U2_1.5 | length 51.7
  TOP w0.15: 7.983,31.115 JMEDIA_MALE.24@9.684,31.115 ; v1(43.365,31.32) 43.365,32.01 44.139,32.784 48.309,32.784 48.853,32.24 R21_1.1@48.853,29.145 48.112,29.145 47.803,28.836 U2_1.5@47.803,28.22
  BOTTOM w0.15: 7.983,31.115 9.842,31.115 11.271,31.115 11.926,31.77 14.69,31.77 15.615,32.695 28.66,32.695 29.761,33.796 32.539,33.796 33.524,32.811 35.377,32.811 36.99,31.197 37.44,31.197 38.317,30.32 42.365,30.32 v1(43.365,31.32)
  other v1: 7.683,31.115
HEADPHONES.HPH_L: D6.C J6.2 J9.36 JMISC_MALE.36 | length 37.7
  TOP w0.15: v1(39.6,42.5) 39.686,42.414 40.496,42.414 D6.C@40.565,42.345 40.565,41.254 40.111,40.8 v1(40,40.8) ; v1(45.161,36.549) 45.62,36.089 45.62,34.462 45.845,34.237 48.836,34.237 50.674,32.399 50.674,25.898 51.773,24.8 54.102,24.8 54.834,24.068 54.834,24.058 54.862,24.03 54.862,23.583 54.95,23.495 JMISC_MALE.36@56.412,23.495
  TOP w0.2: JMISC_MALE.36@56.747,23.495 v1(58.295,23.495)
  BOTTOM w0.15: J6.2@38.465,42.82 J6.2@38.785,42.5 ; J6.2@38.94,42.345 J6.2@38.785,42.5 ; v1(39.6,42.5) J6.2@38.785,42.5 ; v1(40,40.8) 40,38.01 41.01,37 44.71,37 v1(45.161,36.549)
  BOTTOM w0.2: J9.36@56.705,23.495 v1(58.295,23.495)
HEADPHONES.HPH_R: D5.C J6.3 J9.38 JMISC_MALE.38 | length 42.4
  TOP w0.15: v1(39.7,46.7) 39.786,46.614 40.095,46.614 40.163,46.545 D5.C@40.565,46.545 41.255,46.545 41.5,46.3 41.5,40.5 43.9,38.1 43.9,34.6 44.972,33.528 48.889,33.528 50.195,32.223 50.195,25.752 51.461,24.486 54.014,24.486 54.585,23.915 54.585,22.541 54.901,22.225 JMISC_MALE.38@56.747,22.225
  TOP w0.2: JMISC_MALE.38@56.747,22.225 v1(58.295,22.225)
  BOTTOM w0.15: J6.3@38.94,46.545 J6.3@38.465,47.02 39.38,47.02 v1(39.7,46.7)
  BOTTOM w0.2: J9.38@56.705,22.225 v1(58.295,22.225)
HEADPHONES.HS_DET: D3.C J6.10 J9.42 JMISC_MALE.42 R14.2 | length 68.7
  TOP w0.15: R14.2@27.015,43.295 26.553,43.295 26.465,43.207 26.465,41.02 26.665,40.82 27.243,40.82 28.663,39.4 38.22,39.4 v1(39.04,40.22) ; v1(54.6,19.9) 54.65,19.9 54.908,19.642 56.704,19.642 JMISC_MALE.42@56.747,19.685
  TOP w0.2: JMISC_MALE.42@56.747,19.685 v1(58.295,19.685)
  TOP w0.3: R14.2@27.015,43.295 D3.C@28.065,43.295 28.74,43.295 29.084,43.639 v1(29.084,44.352)
  BOTTOM w0.15: v1(39.04,40.22) 38.302,39.482 38.302,34.898 39.775,33.425 48.489,33.425 52.599,29.314 52.599,24.086 51.799,23.286 49.38,23.286 48.552,22.458 48.552,19.49 48.857,19.184 51.52,19.184 51.835,19.499 52.458,19.499 52.597,19.36 53.22,19.36 53.527,19.667 53.527,19.812 53.615,19.9 v1(54.6,19.9)
  BOTTOM w0.2: J9.42@56.705,19.685 v1(58.295,19.685)
  BOTTOM w0.3: v1(29.084,44.352) 29.141,44.295 29.454,44.295 29.771,43.978 29.771,43.178 J6.10@30.122,42.827
LINEOUT.LINEOUT_M: D8.C J7.3 J9.34 JMISC_MALE.34 R10.2 | length 37.4
  TOP w0.2: JMISC_MALE.34@56.747,24.765 57.925,24.765 58.137,24.553 v1(58.227,24.553) ; D8.C@57.29,46.52 R10.2@57.289,47.485
  TOP w0.4: v1@56.19,46.52 57.282,46.52 D8.C@57.286,46.516 ; v1(56.19,46.62) 56.157,46.587 54.551,46.587 53.989,46.025 53.989,45.377 53.99,45.376 53.99,44.265 52.94,43.215 52.94,39.964 52.265,39.289 52.265,38.965 51.269,37.969 51.269,26.601 52.401,25.469 54.206,25.469 54.911,24.765 JMISC_MALE.34@56.747,24.765
  BOTTOM w0.2: J9.34@56.705,24.765 57.906,24.765 58.118,24.553 v1(58.227,24.553)
  BOTTOM w0.4: J7.3@53.465,47.02 55.165,47.02 55.565,46.62 v1(56.19,46.62)
LINEOUT.LINEOUT_P: D7.C J7.2 J9.32 JMISC_MALE.32 | length 25
  TOP w0.2: 53.1,39.328 53.1,39.5 53.475,39.875 D7.C@53.8,39.875 ; JMISC_MALE.32@56.747,26.035 v1(58.295,26.035)
  TOP w0.4: 53.1,39.328 53.1,38.851 52.114,37.864 52.114,27.046 53.125,26.035 JMISC_MALE.32@56.747,26.035 ; D7.C@53.8,39.875 v1(53.8,40.9)
  BOTTOM w0.2: J9.32@56.705,26.035 v1(58.295,26.035)
  BOTTOM w0.4: J7.2@53.465,42.82 53.5,42.785 53.5,41.2 v1(53.8,40.9)